# EAGLE board rod-board (EAGLE 9.5.1)
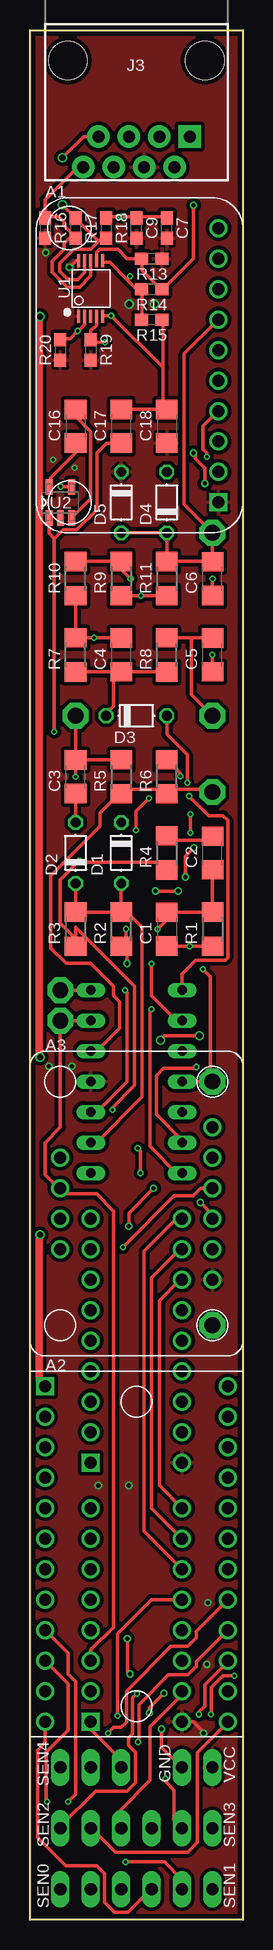
[diagram p0: board, top side]
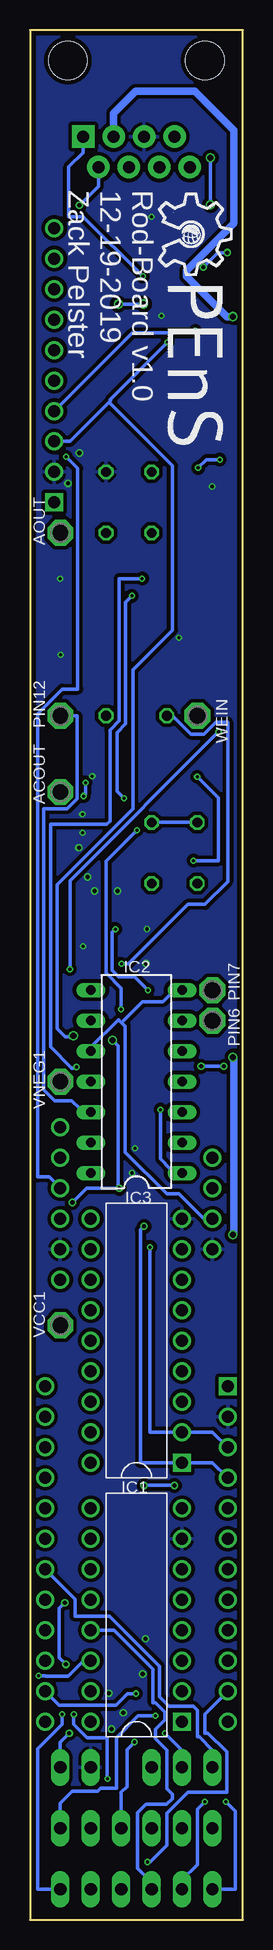
[diagram p1: board, bottom side, seen from below]

Size 17.78 x 157.48 mm. Coordinates in mm from the lower left corner, seen from the top.
Outline: 0,0 0,157.48 17.78,157.48 17.78,0 0,0
Copper layers (1*16): Top 0.035559375mm / dielectric 1.6mm / Bottom 0.035559375mm
Design rules "oshpark-2layer": minimum track width 6mil, minimum drill 10mil, track to track 6mil, track to pad 6mil, pad to pad 6mil, via to via 6mil, smd to smd 6mil, copper to edge 15mil, drill to drill 6mil, minimum pad ring 5mil, minimum via ring 5mil, stop-mask expansion 2.5mil, vias tented up to drill 0mil, thermal gap 10mil
Net classes: 0 default: width 0.305 mm; 1 VCC: width 0.61 mm; 2 GND: width 0.61 mm

## Footprints (pad centres in the part's own frame; a part is rotated, then mirrored left to right if it is on the bottom)
ADS1115 = drill 1: A0 17.78,2.032; A1 20.32,2.032; A2 22.86,2.032; A3 25.4,2.032; ADDR 12.7,2.032; ALRT 15.24,2.032; GND 5.08,2.032; SCL 7.62,2.032; SDA 10.16,2.032 | drill 1 square: VDD 2.54,2.032
TCA9548A = drill 1: A0 1.27,16.51; A1 1.27,13.97; A2 1.27,11.43; GND 1.27,26.67; RST 1.27,19.05; SC0 1.27,6.35; SC1 1.27,1.27; SC2 16.51,3.81; SC3 16.51,8.89; SC4 16.51,13.97; SC5 16.51,19.05; SC6 16.51,24.13; SC7 16.51,29.21; SCL 1.27,21.59; SD0 1.27,8.89; SD1 1.27,3.81; SD2 16.51,1.27; SD3 16.51,6.35; SD4 16.51,11.43; SD5 16.51,16.51; SD6 16.51,21.59; SD7 16.51,26.67; SDA 1.27,24.13 | drill 1 square: VIN 1.27,29.21
DS3502 = drill 1: A0 16.51,2.54; A1 19.05,2.54; GND 8.89,2.54; RH 13.97,15.24; RL 8.89,15.24; RW 11.43,15.24; SCL 11.43,2.54; SDA 13.97,2.54; V+ 16.51,15.24; VCC 6.35,2.54
P1-13 = drill 1.321 pad 2.159 octagon: TP 0,0
C1206 = smd 1.6 x 1.8: 1 -1.4,0; 2 1.4,0
0603 = smd 1.1 x 1: 1 -0.85,0; 2 0.85,0
D-5 = drill 0.813 octagon: A 2.54,0; C -2.54,0
CD4051BE = drill 1: 0 7.62,8.89; 1 5.08,8.89; 2 2.54,8.89; 3 10.16,8.89; 5 10.16,1.27; 6 2.54,1.27; 7 7.62,1.27; A 12.7,8.89; B 15.24,8.89; C 17.78,8.89; COM 5.08,1.27; INH 12.7,1.27; VDD 0,8.89; VEE 15.24,1.27; VSS 17.78,1.27 | drill 1 square: 4 0,1.27
DIL14 = drill 0.813 long: 1 -7.62,-3.81; 2 -5.08,-3.81; 3 -2.54,-3.81; 4 0,-3.81; 5 2.54,-3.81; 6 5.08,-3.81; 7 7.62,-3.81; 8 7.62,3.81; 9 5.08,3.81; 10 2.54,3.81; 11 0,3.81; 12 -2.54,3.81; 13 -5.08,3.81; 14 -7.62,3.81
MCP23008 = drill 1: A0 11.43,2.54; A1 8.89,2.54; A2 6.35,2.54; GP0 21.59,10.16; GP1 19.05,10.16; GP2 16.51,10.16; GP3 13.97,10.16; GP4 11.43,10.16; GP5 8.89,10.16; GP6 6.35,10.16; GP7 3.81,10.16; INT 19.05,2.54; NC 16.51,2.54; RESET 13.97,2.54; SDA 3.81,2.54; VDD 1.27,10.16; VSS 21.59,2.54 | drill 1 square: SCL 1.27,2.54
RJ45-8 = drill 1 pad 1.88 square: 1 -4.445,6.35 | drill 1 pad 1.88: 2 -3.175,8.89; 3 -1.905,6.35; 4 -0.635,8.89; 5 0.635,6.35; 6 1.905,8.89; 7 3.175,6.35; 8 4.445,8.89 | hole 3.2: -5.715,0; 5.715,0
1X03 = drill 1.016 long: 1 -2.54,0; 2 0,0; 3 2.54,0
1X02 = drill 1.016 long: 1 -1.27,0; 2 1.27,0
R1206 = smd 1.6 x 1.803: 1 -1.422,0; 2 1.422,0
TSSOP10 = smd 1.1 x 0.25: 1 -2.259,1.018; 2 -2.259,0.517; 3 -2.259,0.018; 4 -2.259,-0.482; 5 -2.259,-0.988; 6 2.366,-0.988; 7 2.366,-0.482; 8 2.366,0.018; 9 2.366,0.517; 10 2.366,1.018
SOT95P280X145-5N = smd 1.27 x 0.559: 1 -1.295,0.94; 2 -1.295,0; 3 -1.295,-0.94; 4 1.295,-0.94; 5 1.295,0.94

## Placement (x,y rotation side)
A1  ADS1115  [ADS1115]  17.78,115.57 90 top
A2  TCA9548A  [TCA9548A]  0,15.24 0 top
A3  DS3502  [DS3502]  17.78,46.99 90 top
ACOUT  PTR1PAD1-13  [P1-13]  15.24,93.98 0 bottom
AOUT  PTR1PAD1-13  [P1-13]  15.24,115.57 0 bottom
C1  100nF  [C1206]  11.43,82.55 270 top
C2  100nF  [C1206]  15.24,88.9 90 top
C3  100nF  [C1206]  3.81,95.25 90 top
C4  1uF  [C1206]  7.62,105.41 270 top
C5  1uF  [C1206]  15.24,105.41 90 top
C6  1uF  [C1206]  15.24,111.76 90 top
C7  0.1uF  [0603]  11.43,140.97 90 top
C9  1.0uF  [0603]  8.89,140.97 90 top
C16  1uF  [C1206]  3.81,124.46 270 top
C17  1uF  [C1206]  7.62,124.46 270 top
C18  1uF  [C1206]  11.43,124.46 270 top
D1  1N4001  [D-5]  7.62,88.9 270 top
D2  1N4001  [D-5]  3.81,88.9 90 top
D3  1N4001  [D-5]  8.89,100.33 0 top
D4  1N4001  [D-5]  11.43,118.11 90 top
D5  1N4001  [D-5]  7.62,118.11 270 top
IC1  CD4051BE  [CD4051BE]  3.81,16.51 90 bottom
IC2  TL074P  [DIL14]  8.89,69.85 90 bottom
IC3  MCP23008  [MCP23008]  2.54,36.83 90 bottom
J3  RJ45  [RJ45-8]  8.89,154.94 180 top
JP1  SENSOR0  [1X03]  5.08,2.54 0 top
JP2  SENSOR1  [1X03]  12.7,2.54 0 top
JP3  SENSOR2  [1X03]  5.08,7.62 0 top
JP4  SENSOR3  [1X03]  12.7,7.62 0 top
JP5  SENSOR4  [1X03]  5.08,12.7 0 top
JP6  POWER  [1X02]  13.97,12.7 0 top
PIN6  PTR1PAD1-13  [P1-13]  2.54,74.93 0 bottom
PIN7  PTR1PAD1-13  [P1-13]  2.54,77.47 0 bottom
PIN12  PTR1PAD1-13  [P1-13]  15.24,100.33 0 bottom
R1  1K  [R1206]  15.24,82.55 90 top
R2  10K  [R1206]  7.62,82.55 270 top
R3  22K  [R1206]  3.81,82.55 90 top
R4  1K  [R1206]  11.43,88.9 90 top
R5  2K  [R1206]  7.62,95.25 90 top
R6  1K  [R1206]  11.43,95.25 270 top
R7  10K  [R1206]  3.81,105.41 270 top
R8  4.7K  [R1206]  11.43,105.41 270 top
R9  10K  [R1206]  7.62,111.76 90 top
R10  5K  [R1206]  3.81,111.76 270 top
R11  4.7K  [R1206]  11.43,111.76 90 top
R13  390  [0603]  10.16,138.43 0 top
R14  100  [0603]  10.16,135.89 0 top
R15  390  [0603]  10.16,133.35 180 top
R16  390  [0603]  1.27,140.97 270 top
R17  100  [0603]  3.81,140.97 270 top
R18  390  [0603]  6.35,140.97 270 top
R19  4.7k  [0603]  5.08,130.81 270 top
R20  4.7k  [0603]  2.54,130.81 270 top
U1  PCA9615  [TSSOP10]  5.08,135.89 90 top
U2  TPS60400DBVR  [SOT95P280X145-5N]  2.54,118.11 90 top
U$1  OPENS-LOGO  [OPENS-LOGO]  10.79,144.15 270 bottom
VCC1  PTR1PAD1-13  [P1-13]  15.24,49.53 270 bottom
VNEG1  PTR1PAD1-13  [P1-13]  15.24,69.85 0 bottom
WEIN  PTR1PAD1-13  [P1-13]  3.81,100.33 0 bottom

## Library data of the parts
A1-A3 IC1 IC3 = PNNL_Probe
ACOUT AOUT PIN6 PIN7 PIN12 VCC1 VNEG1 WEIN = testpad
C1-C6 C16-C18 = rcl; SPICEPREFIX: C
C7 = SparkFun-Capacitors; PROD_ID: CAP-00810
C9 = SparkFun-Capacitors; PROD_ID: CAP-00868
D1-D5 = diode
IC2 = linear
J3 = SparkFun-Connectors; PROD_ID: CONN-08506; SF_ID: PRT-00643
JP1-JP6 = pinhead_simple
R1-R11 = rcl; SPICEPREFIX: R
R13 R15 R16 R18 = SparkFun-Resistors; PROD_ID: RES-07864
R14 R17 = SparkFun-Resistors; PROD_ID: RES-07863
R19 R20 = SparkFun-Resistors; PROD_ID: RES-07857
U1 = SparkFun-IC-Comms; PROD_ID: IC-13899
U2 = TPS60400DBVR; AVAILABILITY: Unavailable; DESCRIPTION: 60mA Charge Pump Voltage Inverter with Variable Switching Frequency 5-SOT-23 -40 to 85; MF: Texas Instruments; MP: TPS60400DBVR; PACKAGE: SOT-23-5 Texas Instruments; PRICE: None
U$1 = opens-logo

## Nets
3V_I2C: A2.VIN J3.3
A: IC1.A IC3.GP0
AIN: A3.RH IC1.COM IC2.6 PIN6.TP
AOUT: A1.A0 AOUT.TP C6.2 D4.C D5.A R11.2
B: IC1.B IC3.GP1
C: IC1.C IC3.GP2
DSCL+: J3.2 R13.1 R14.2 U1.7
DSCL-: J3.1 R14.1 R15.2 U1.6
DSDA+: J3.8 R16.1 R17.2 U1.8
DSDA-: J3.7 R17.1 R18.2 U1.9
EC0: IC1.0 JP1.3
EC1: IC1.1 JP2.3
EC2: IC1.2 JP3.3
EC3: IC1.3 JP4.3
EC4: IC1.4 JP5.3
EN: U1.3
GND: A1.GND A2.GND A3.GND A3.RL C1.2 C4.1 C5.1 C6.1 C7.2 C9.2 C17.1 C18.1 D4.A IC1.VEE IC3.VSS J3.5 JP6.1 R1.1 R2.2 R6.1 R7.1 R10.2 R15.1 R18.1 U1.5 U2.4
N$1: C1.1 C2.1 IC2.3 R1.2
N$2: C2.2 R4.2
N$3: C3.2 IC2.1 R3.1 R4.1 R5.2 WEIN.TP
N$4: D1.A D2.C IC2.2 R2.1 R3.2
N$5: ACOUT.TP IC2.5 R5.1 R6.2
N$9: C3.1 D1.C D2.A
N$12: C4.2 D3.C IC2.9 R7.2 R8.2
N$13: D3.A IC2.8
N$15: C5.2 IC2.12 PIN12.TP R8.1
N$16: IC2.13 R9.2 R10.1
N$18: IC2.14 R9.1 R11.1
N$27: C16.2 U2.5
N$28: C16.1 U2.3
POT: A3.RW IC2.7 IC2.10 PIN7.TP
SC0: A2.SC0 JP1.1
SC1: A2.SC1 JP2.1
SC2: A2.SC2 JP3.1
SC3: A2.SC3 JP4.1
SC4: A2.SC4 JP5.1
SCL: A1.SCL A2.SCL A3.SCL IC3.SCL R19.1 U1.4
SD0: A2.SD0 JP1.2
SD1: A2.SD1 JP2.2
SD2: A2.SD2 JP3.2
SD3: A2.SD3 JP4.2
SD4: A2.SD4 JP5.2
SDA: A1.SDA A2.SDA A3.SDA IC3.SDA R20.1 U1.2
VCC: A1.VDD A3.VCC C7.1 C9.1 C18.2 D5.C IC1.VDD IC2.4 IC3.VDD J3.4 JP6.2 R13.2 R16.2 R19.2 R20.2 U1.1 U1.10 U2.2 VCC1.TP
VNEG: C17.2 IC2.11 U2.1 VNEG1.TP

## Tracks (layer width: path | path; a pad name or v marks a point on that pad's centre or on a via)
3V_I2C  (via drill 0.5)
  Top 0.61: A2.VIN 0.76,44.96 0.76,57 v0.83,57.07 | v0.83,71.89 0.76,71.96 0.76,133.53 v0.83,133.6
  Bottom 0.61: v0.83,57.07 0.76,57.14 0.76,71.81 v0.83,71.89 | v0.83,133.6 1.34,133.6 4.7,136.96 4.7,137.43 0.77,141.37 0.77,149.13 4.01,152.38 8.96,152.38 10.79,150.54 J3.3
A
  Top 0.305: IC1.A 9.53,32.38 9.53,55.72 12.22,58.42 IC3.GP0
AIN
  Top 0.305: IC2.6 PIN6.TP 2.54,66.04 1.27,64.77 1.27,62.07 2.54,60.8 A3.RH 3.02,60.48 5.56,60.48 6.99,59.05 6.99,24.39 5.08,22.48 IC1.COM
AOUT
  Top 0.305: R11.2 D4.C D5.A | 15.24,113.19 AOUT.TP 12.86,117.95 12.86,130.49 15.72,133.35 A1.A0 | 15.24,113.19 R11.2 | R11.2 | 15.24,113.19 C6.2
B
  Top 0.305: IC1.B 10.16,34.29 10.16,53.5 12.54,55.88 IC3.GP1
C
  Top 0.305: IC1.C 10.79,36.2 10.79,51.59 12.54,53.34 IC3.GP2
DSCL+  (via drill 0.35)
  Top 0.305: U1.7 5.56,138.95 5.79,139.19 7.34,139.19 8.1,138.43 R13.1 9.37,138.43 9.37,137.48 10.95,135.89 R14.2 11.11,135.89 13.65,138.43 v13.65,142.88
  Bottom 0.305: v13.65,142.88 12.06,144.46 J3.2
DSCL-  (via drill 0.25)
  Top 0.305: 9.37,135.41 9.37,135.89 R14.1 9.37,135.41 | 9.37,135.41 9.37,133.35 R15.2 | 9.37,135.41 8.18,136.6 8.09,136.69 | 8.09,136.69 6.67,138.11 6.19,138.11 U1.6 | 8.09,136.69 v8.35,136.94
  Bottom 0.305: J3.1 13.34,147.27 14.53,146.07 14.53,141.92 13.33,141.92 v8.35,136.94
DSDA+
  Top 0.305: 1.27,141.92 1.27,143.35 3.97,146.05 J3.8 | 3.65,140.49 3.81,140.49 R17.2 3.73,140.3 | 3.73,140.3 2.86,141.18 2.86,141.45 2.38,141.92 1.27,141.92 | 1.27,141.92 R16.1 | U1.8 5.06,136.98 4.13,136.05 3.09,136.05 1.86,137.28 1.86,138.2 2.86,139.2 2.86,139.7 3.65,140.49 | 3.65,140.49 3.73,140.3
DSDA-  (via drill 0.51)
  Top 0.305: 5.71,139.86 5.87,140.02 6.35,140.02 R18.2 | 5.71,139.86 5.05,139.2 3.65,139.2 2.48,138.03 2.48,137.38 3.18,136.68 3.97,136.68 4.57,137.28 4.57,138.25 U1.9 | 5.71,139.86 3.81,141.76 R17.1 v2.71,142.92 | J3.7 4.46,148.59 v2.71,146.84
  Bottom 0.305: v2.71,142.92 v2.71,146.84
EC0
  Bottom 0.305: IC1.0 10.77,24.13 7.5,20.86 7.5,18.1 7.3,18.1 6.51,17.3 6.51,16.67 7.3,15.88 7.3,15.08 6.35,14.13 6.35,10.93 5.87,10.45 5.87,10.1 6.36,9.61 8.11,9.61 8.81,8.91 8.81,4.29 7.62,3.1 JP1.3
EC1  (via drill 0.25)
  Top 0.305: v17.06,20.32 16.09,20.32 15.13,19.36 15.13,17.18 v15.1,17.14
  Bottom 0.305: v17.06,20.32 16.5,20.32 16.45,20.28 14.6,20.28 13.29,21.59 IC1.1 | v15.1,17.14 15.1,16.28 17.14,14.23 17.14,2.54 JP2.3
EC2
  Top 0.305: IC1.2 12.7,18.73 10.04,16.07 10.04,11.63 7.46,9.05 7.46,7.78 JP3.3
EC3  (via drill 0.25)
  Top 0.305: IC1.3 10.14,26.67 7.3,23.84 v7.3,16.99
  Bottom 0.305: v7.3,16.99 8.75,16.99 10.55,15.19 10.55,10.95 11.88,10.95 12.13,10.7 14.27,10.7 15.24,9.73 JP4.3
EC4
  Top 0.305: IC1.4 5.08,15.88 7.62,13.34 JP5.3
GND  (via drill 0.25, 0.35)
  Top 0.305: R7.1 v5.34,106.84 7.62,106.84 C4.1 | R7.1 R10.2 | R7.1 | C1.2 11.43,81.12 v13.34,81.12 R1.1 | 8.89,141.92 v7.62,141.92 6.35,141.92 R18.1 | 8.89,141.92 11.43,141.92 C7.2 | 8.89,141.92 C9.2 | U1.5 6.12,133.68 v6.79,133.68 11.11,129.36 | 11.11,129.36 11.11,126.21 11.43,125.89 C18.1 11.27,125.89 7.62,125.89 C17.1 | 11.11,129.36 11.11,133.35 R15.1 | U2.4 3.45,119.44 v2.57,119.44 | v15.23,105.41 C5.1 | v15.25,111.76 C6.1 | v8.01,82.56 8.01,81.52 R2.2 8.1,80.65 v8.1,79.69 | R6.1 12.57,95.53 v12.57,95.31 | v13.69,89.33 12.97,88.61 v12.97,86.9 | v10.48,85.72 v12.38,85.72 | v9.99,17.25 9.99,17.67 v11.2,18.88 | v8.36,20.48 8.13,20.72 v8.13,23.42 | v13.65,122.24 13.83,122.06 13.83,121.75 14.61,120.97 v14.61,119.7 | JP6.1 12.67,12.7 10.98,14.39 v10.98,15.89 | v13.39,90.57 13.39,92.13 v13.4,92.14 | v9,64.28 9.24,64.04 v9.24,62.23
  pour Bottom (isolate 0.305): -2.54,160.02 -2.54,-2.54 20.32,-2.54 20.32,160.02
N$1  (via drill 0.25)
  Top 0.305: R1.2 12.06,83.98 | 12.06,83.98 11.43,83.98 C1.1 12.06,83.98 | R1.2 C2.1 | R1.2 | IC2.3 5.56,67.31 8.1,69.85 8.1,77.31 v7.94,77.47 | 12.06,83.98 v10.64,82.55
  Bottom 0.305: v7.94,77.47 9.05,78.58 10.37,78.58 10.91,79.13 10.91,82.27 v10.64,82.55
N$2
  Top 0.305: R4.2 11.81,89.95 14.89,89.95 C2.2
N$3  (via drill 0.25)
  Top 0.305: WEIN.TP 3.81,96.68 | 3.81,96.68 R5.2 | 3.81,96.68 C3.2 v3.82,95.25 | 3.81,81.76 3.81,82.71 8.73,77.79 8.73,69.53 6.88,67.68 v6.88,67.52 | 3.81,81.76 R3.1 | 3.81,81.76 2.54,83.03 2.54,86.68 3.97,88.11 | v4.13,88.27 3.97,88.11 | R4.1 11.43,87.63 10.95,88.11 4.13,88.11 4.05,88.03 3.97,88.11
  Bottom 0.305: IC2.1 5.4,62.55 6.03,62.55 6.88,63.4 v6.88,67.52 | v3.82,95.25 2.06,93.5 2.06,88.27 v4.13,88.27
N$4
  Top 0.305: D2.C R3.2 | D1.A 7.62,84.45 | IC2.2 5.56,64.77 9.37,68.58 9.37,82.71 7.62,84.45 | 7.62,84.45 R2.1 | R2.1 R3.2 | R3.2 | R2.1
N$5
  Top 0.305: IC2.5 5.56,72.39 7.46,74.3 7.46,76.52 6.99,76.99 6.99,77.79 5.08,79.69 3.02,79.69 1.75,80.96 1.75,87 5.87,91.12 5.87,92.23 7.62,93.98 R5.1 8.01,94.22 11.04,94.22 R6.2 11.43,94.2 15.02,94.2 ACOUT.TP
N$9
  Top 0.305: D2.A C3.1
  Bottom 0.305: D2.A D1.C
N$12  (via drill 0.25)
  Top 0.305: 6.99,103.98 R7.2 | 6.99,103.98 7.62,103.98 | 7.62,103.98 R8.2 | 7.62,103.98 C4.2 6.99,103.98 | IC2.9 12.22,74.93 10.14,77.01 v10.14,79.65 | 6.99,103.98 6.99,101.12 6.35,100.49 D3.C
  Bottom 0.305: v10.14,79.65 9.56,79.65 4.59,84.61 3.17,84.61 1.27,86.52 1.27,99.81 2.27,99.81 3.27,98.81 4.35,98.81 5.87,100.33 D3.C
N$13  (via drill 0.25)
  Top 0.305: IC2.8 12.7,78.81 13.86,79.96 16.3,79.96 16.51,80.17 16.51,91.61 16.11,92.02 14.92,92.02 v13.29,93.64 | v13.15,94.76 13.13,94.77 13.13,97.1 11.43,98.81 D3.A
  Bottom 0.305: v13.15,94.76 13.15,93.79 v13.29,93.64
N$15
  Top 0.305: 13.49,106.84 R8.1 | 13.49,106.84 15.24,106.84 C5.2 | 13.49,106.84 13.49,102.08 PIN12.TP
  Bottom 0.305: IC2.12 13.02,67.63 13.65,67.63 14.29,68.26 15.72,68.26 16.64,69.18 16.64,92.59 14.66,92.59 13.85,93.4 13.85,100.33 PIN12.TP
N$16  (via drill 0.25)
  Top 0.305: 7.14,113.19 R9.2 7.14,113.19 | 7.14,113.19 6.99,113.19 | 6.99,113.19 R10.1 | IC2.13 12.7,64.97 10.55,67.13 10.55,70.34 11.16,70.95 13.79,70.95 v13.9,71.06 | 6.99,113.19 v8.41,111.76
  Bottom 0.305: v13.9,71.06 14,70.96 14.29,70.96 16.06,72.73 16.06,91.28 11.39,91.28 11.11,91.56 11.11,99.13 10.33,99.91 10.33,111.76 v8.41,111.76
N$18  (via drill 0.25)
  Top 0.305: v9.26,110.33 R11.1 | v9.26,110.33 R9.1 | IC2.14 12.22,62.23 10,64.45 10,75.72 v10.16,75.88 | v8.85,90.8 8.85,92.36 v9.93,93.45 | v9.26,110.33
  Bottom 0.305: v10.16,75.88 10.16,77.63 11.43,78.9 11.43,88.22 v8.85,90.8 | v9.93,93.45 10.52,94.03 10.52,98.94 9.8,99.65 9.8,109.79 v9.26,110.33
N$27
  Top 0.305: C16.2 3.81,122.24 1.75,120.17 1.75,119.54 U2.5
N$28
  Top 0.305: C16.1 3.81,125.29 5.08,124.02 5.08,118.43 3.49,116.84 U2.3
POT
  Top 0.305: PIN7.TP IC2.7
  Bottom 0.305: 9.92,74.53 9.93,74.53 10.4,75 12.7,72.7 IC2.10 | IC2.7 5.71,77.47 6.67,76.52 8.38,76.52 10.14,74.76 9.92,74.53 | A3.RW 3.28,58.42 5.34,60.48 6.35,60.48 9.84,63.98 9.84,74.45 9.92,74.53
SC0  (via drill 0.25)
  Top 0.305: A2.SC0 3.17,19.68 3.17,15.8 1.35,13.98 1.35,9.92 v1.43,9.84
  Bottom 0.305: v1.43,9.84 0.64,9.05 0.64,2.54 JP1.1
SC1
  Top 0.305: A2.SC1 1.27,14.77 0.64,14.14 0.64,6.85 2.97,4.52 5.56,4.52 6.25,3.84 6.25,1.45 7.07,0.62 8.17,0.62 10.09,2.54 JP2.1
SC2  (via drill 0.25)
  Top 0.305: v8.93,18.85 8.57,18.49 8.57,15.49 8.24,15.16 8.24,14.55 8.82,13.97 8.82,11.42 8.12,10.72 5.48,10.72 2.54,7.78 JP3.1
  Bottom 0.305: A2.SC2 15.35,17.89 10.61,17.89 9.65,18.85 v8.93,18.85
SC3  (via drill 0.25)
  Top 0.305: A2.SC3 13.89,21.51 13.89,21.11 13.19,20.41 11.58,20.41 9.1,17.93 9.1,14.87 v9.04,14.81
  Bottom 0.305: v9.04,14.81 9.68,14.16 9.68,11.1 10.16,10.62 JP4.1
SC4
  Bottom 0.305: A2.SC4 14.02,26.72 14.02,25.3 11.15,25.3 6.99,21.13 6.99,18.57 6.19,17.78 4.13,17.78 3.81,17.46 3.81,15.24 3.65,15.24 2.54,14.13 JP5.1
SCL  (via drill 0.25, 0.35, 0.51)
  Top 0.305: U1.4 5.54,133.29 5.54,132.86 5.08,132.4 R19.1 5.08,131.46 v6.29,131.46 | A3.SCL 15.24,58.77 v14.24,59.77 | v8.26,57.78 8.26,58.9 v10.32,60.96 | v10.88,73.3 11.25,73.66 v14.15,73.66
  Bottom 0.305: 11.18,126.46 14.45,123.19 A1.SCL | 11.18,126.46 11.03,126.6 11.09,126.66 v6.29,131.46 | A2.SCL 2.54,38.1 IC3.SCL 8.55,38.1 8.55,57.48 v8.26,57.78 | 11.18,126.46 5.87,121.15 5.87,107.47 9.17,104.18 9.17,92.6 15.52,86.25 15.52,74.26 14.82,73.56 14.25,73.56 v14.15,73.66 | v14.24,59.77 13.05,60.96 v10.32,60.96 10.43,61.07 10.43,72.84 v10.88,73.3
SD0  (via drill 0.25)
  Top 0.305: A2.SD0 3.17,22.23 3.17,20.48 3.81,19.84 3.81,10.48 v3.17,9.84
  Bottom 0.305: v3.17,9.84 3.81,9.21 3.81,4.6 5.08,3.33 JP1.2
SD1  (via drill 0.25)
  Top 0.305: v7.97,4.81 11.22,4.81 12.7,3.33 JP2.2
  Bottom 0.305: A2.SD1 3.17,17.14 3.17,15.56 2.92,15.56 1.35,13.98 1.35,10.64 4.6,10.64 6.35,8.89 6.35,6.19 7.73,4.81 v7.97,4.81
SD2
  Top 0.305: A2.SD2 16.51,16.44 13.99,13.92 13.99,6.44 13.18,5.64 7.14,5.64 5.16,7.62 JP3.2
SD3  (via drill 0.25)
  Top 0.305: A2.SD3 16.51,21.49 14.6,19.58 14.6,17.8 14.11,17.32 v14.11,17.11 | v11.3,11.76 11.3,11.53 12.02,10.81 12.02,8.3 JP4.2
  Bottom 0.305: v14.11,17.11 14.11,16.27 13.02,15.18 11.33,15.18 11.33,11.79 v11.3,11.76
SD4  (via drill 0.25)
  Top 0.305: A2.SD4 13.89,24.05 13.89,23.49 13.19,22.79 11.79,22.79 8.05,19.05 8.05,16.46 7.62,16.03 6.99,16.03 v6.51,15.56
  Bottom 0.305: v6.51,15.56 4.76,13.81 4.76,12.7 JP5.2
SDA  (via drill 0.25)
  Top 0.305: R20.1 2.54,131.76 3.33,131.76 v3.97,132.4 4.05,132.4 4.57,132.92 4.57,133.62 U1.2 | A3.SDA 14.29,60.96 13.65,60.33 12.02,60.33 v7.75,56.06 | v14.76,121.92 14.76,122.24 14.45,122.56 14.45,124.46 15.72,125.73 A1.SDA
  Bottom 0.305: v3.97,132.4 4.13,132.24 9.21,132.24 15.72,125.73 A1.SDA | A2.SDA 2.54,40.64 IC3.SDA 7.75,40.64 v7.75,56.06 | v14.76,121.92 13.78,120.94 13.78,102.55 15.08,102.55 17.13,100.5 17.13,61.91 16.19,61.91 A3.SDA
VCC  (via drill 0.25, 0.35, 0.51)
  Top 0.305: U1.10 3.85,138.26 v3.3,137.72 | v14.5,15.55 14.5,15.66 13.65,16.51 IC1.VDD
  Bottom 0.305: v1.59,71.12 v3.49,71.12 | v14.78,21.28 15.33,21.83 15.33,25.96 v14.86,26.42 | v8.26,36.2 v5.71,36.2 | v3.3,137.72 2.08,138.93 v1.3,138.93 | v14.5,15.55 15.24,14.8 JP6.2 | v8.29,134.64 v10.39,134.64 | v1.94,121.68 3.04,121.68 v3.74,120.99
  pour Top (isolate 0.305): -1.27,158.75 19.05,158.75 19.05,-1.27 -1.27,-1.27
VNEG  (via drill 0.25)
  Top 0.305: 15.08,69.85 IC2.11 | 15.08,69.85 15.08,78.58 v14.45,79.22 | 2.03,115.09 v2.03,99 | 15.08,69.85 VNEG1.TP | U2.1 1.6,115.53 2.03,115.09 | 2.03,115.09 2.76,115.82 3.91,115.82 5.59,117.51 5.59,122.26 6.39,123.06 C17.2
  Bottom 0.305: v14.45,79.22 14.45,86.59 v2.03,99

## Text on the board
bPlace: Rod-Board v1.0 / 12-19-2019 / Zack Pelster
tNames: SEN4 | GND | VCC | SEN2 | SEN3 | SEN0 | SEN1